# Altium PCB PCBFonte.PcbDoc
Units mm, origin at the board's own origin, x right, y up, seen from the top; angles counter-clockwise.
Board outline 100 x 70.75 mm, 2 copper layers (Top Layer, Bottom Layer); 47 components, 25 nets, 125 pads, 12 vias.
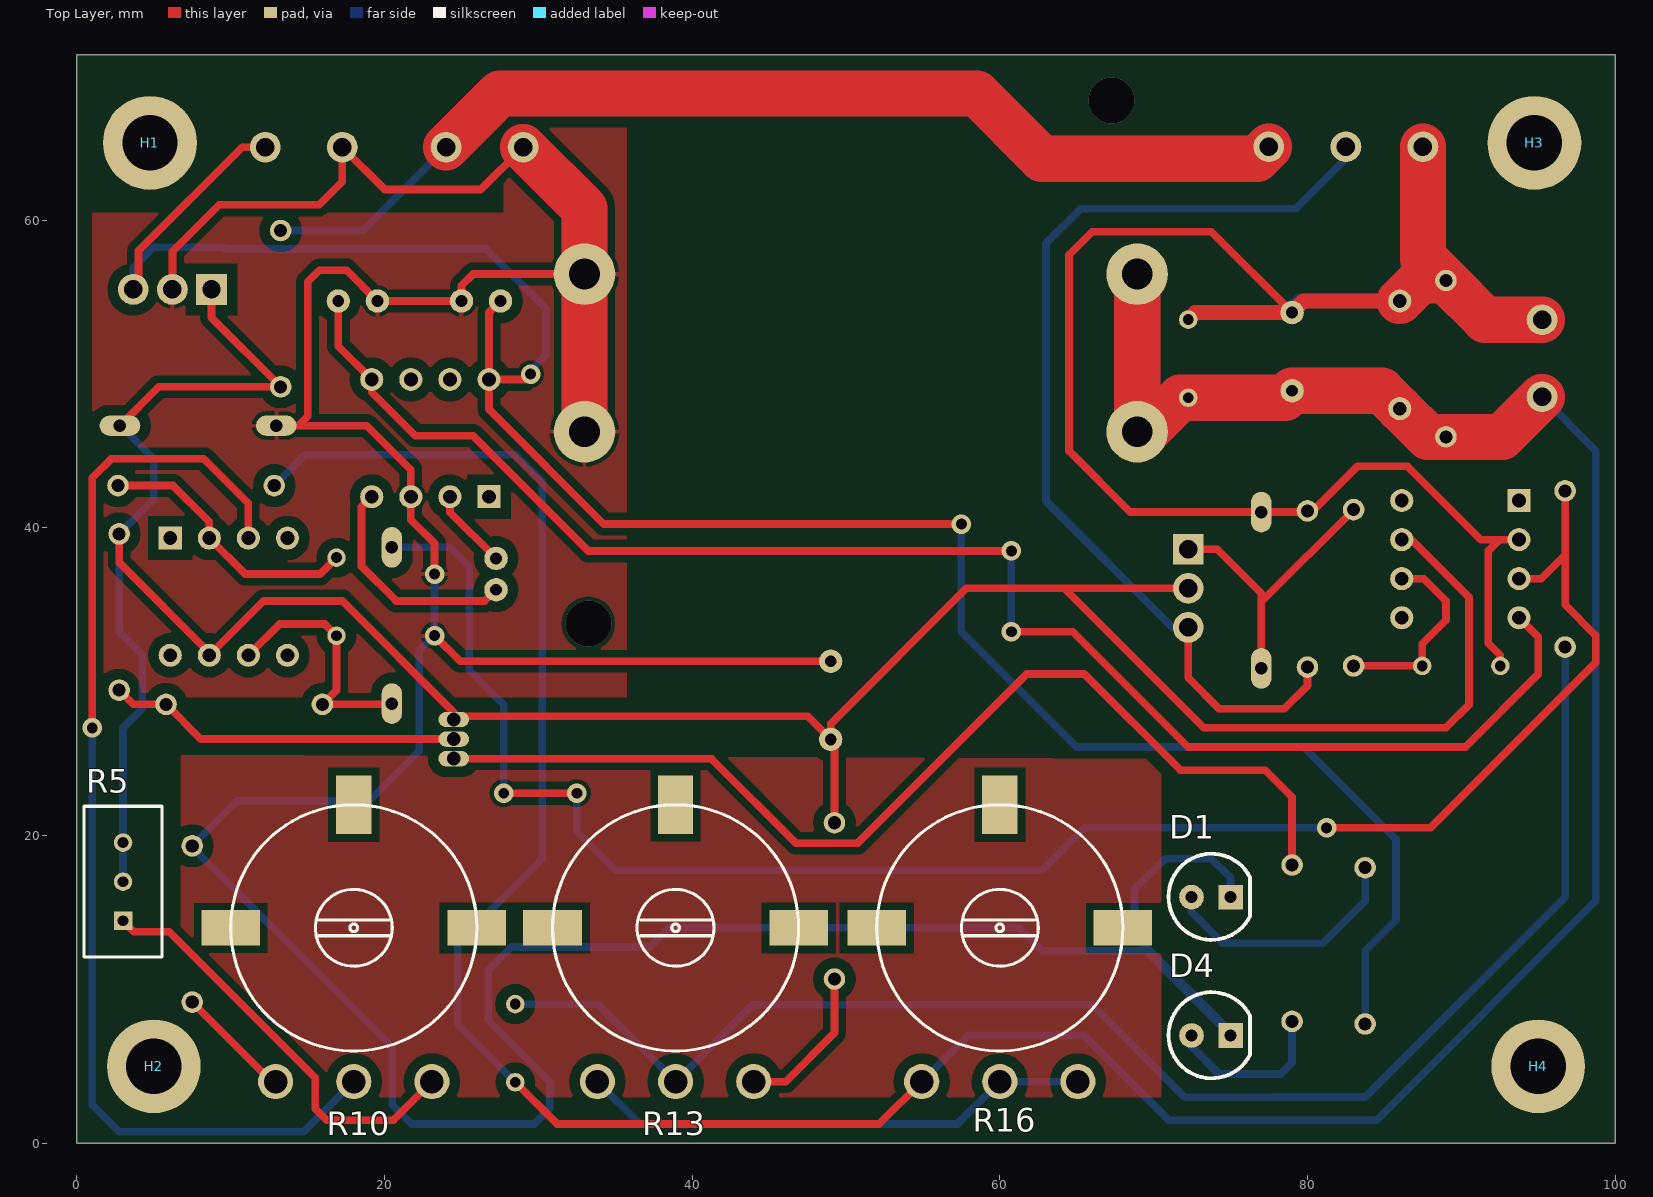
[diagram p0: Top Layer view]
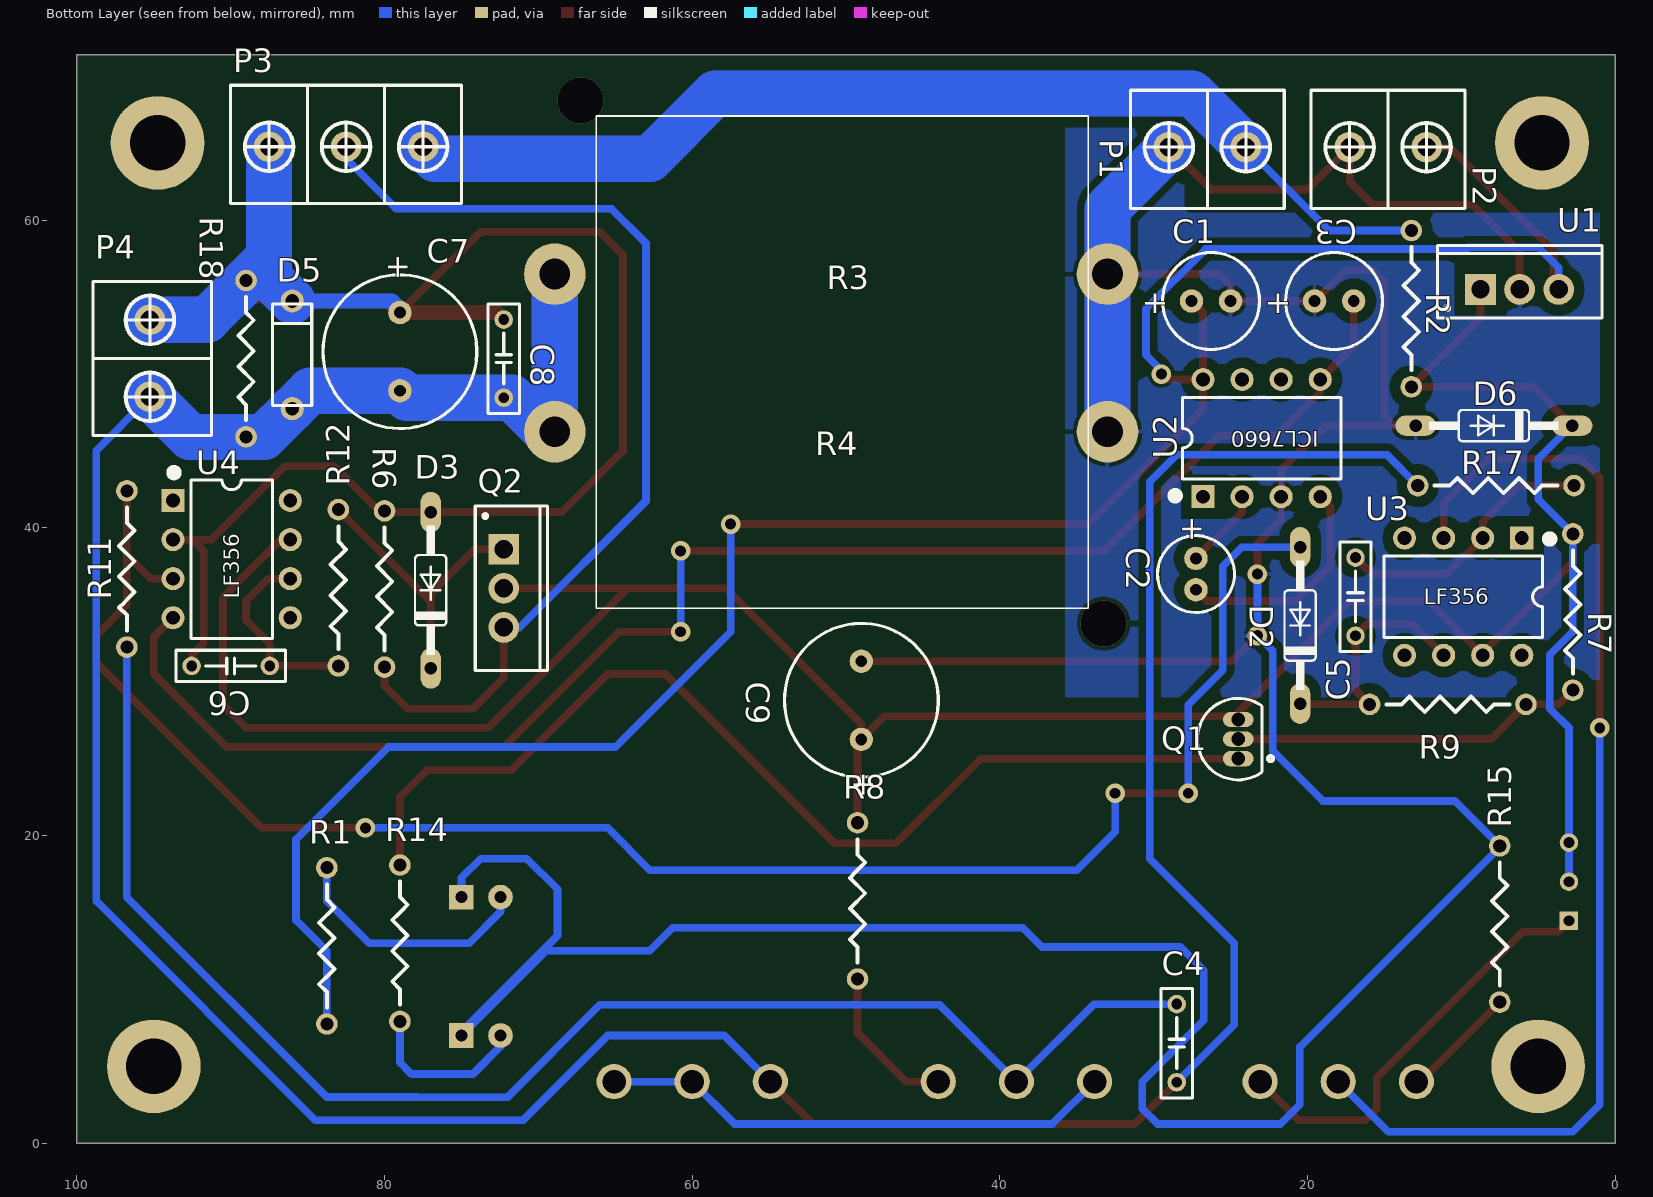
[diagram p1: Bottom Layer view, seen from below]
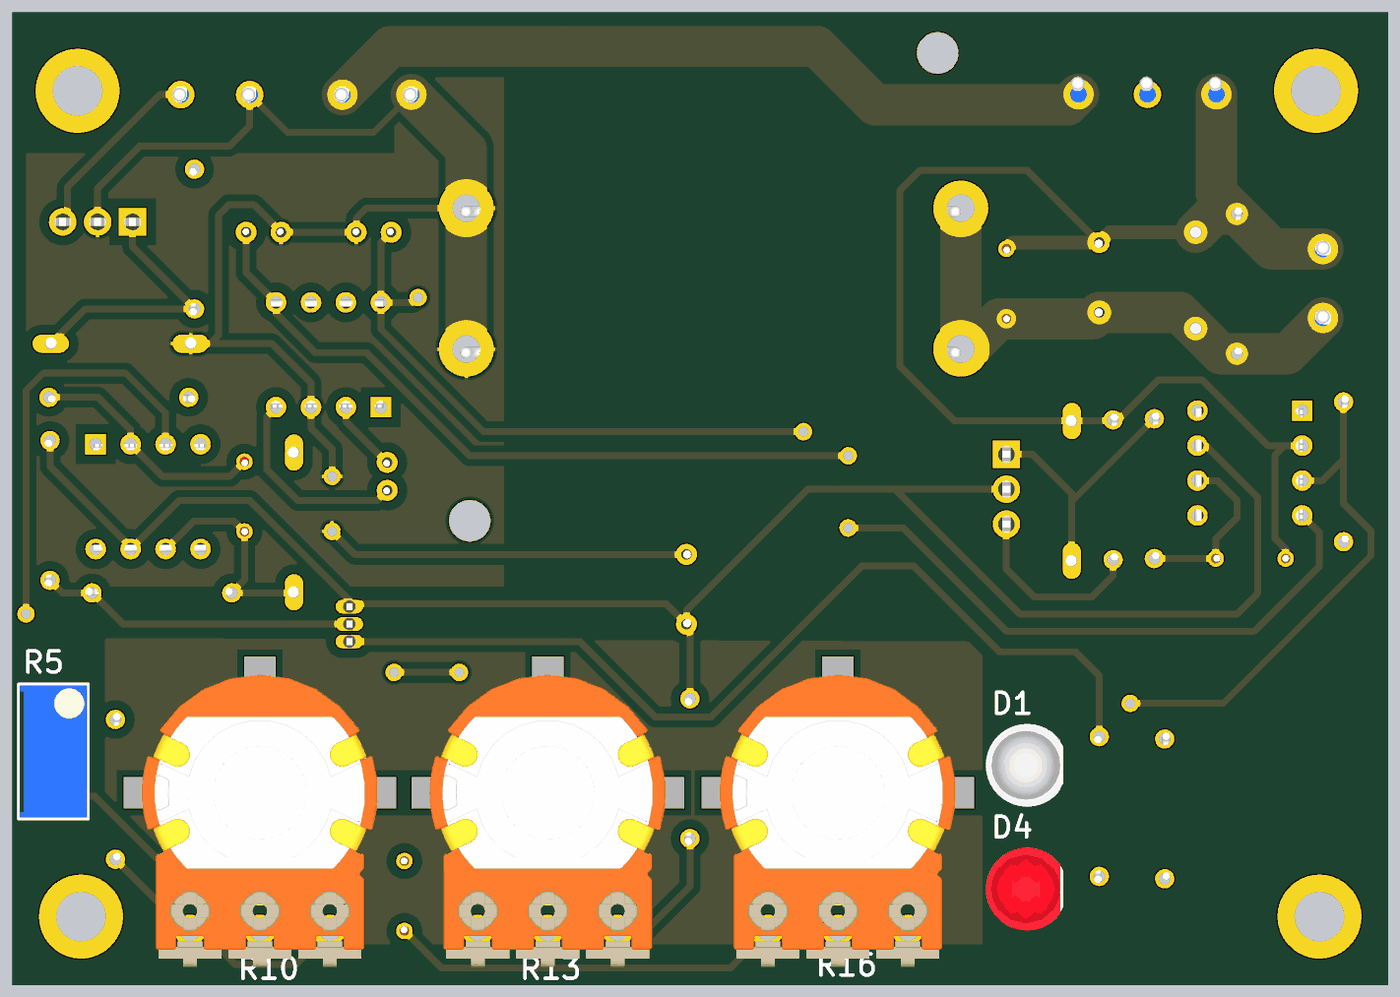
[diagram p2: 3D render of the assembled board from above, using the file's embedded part models]
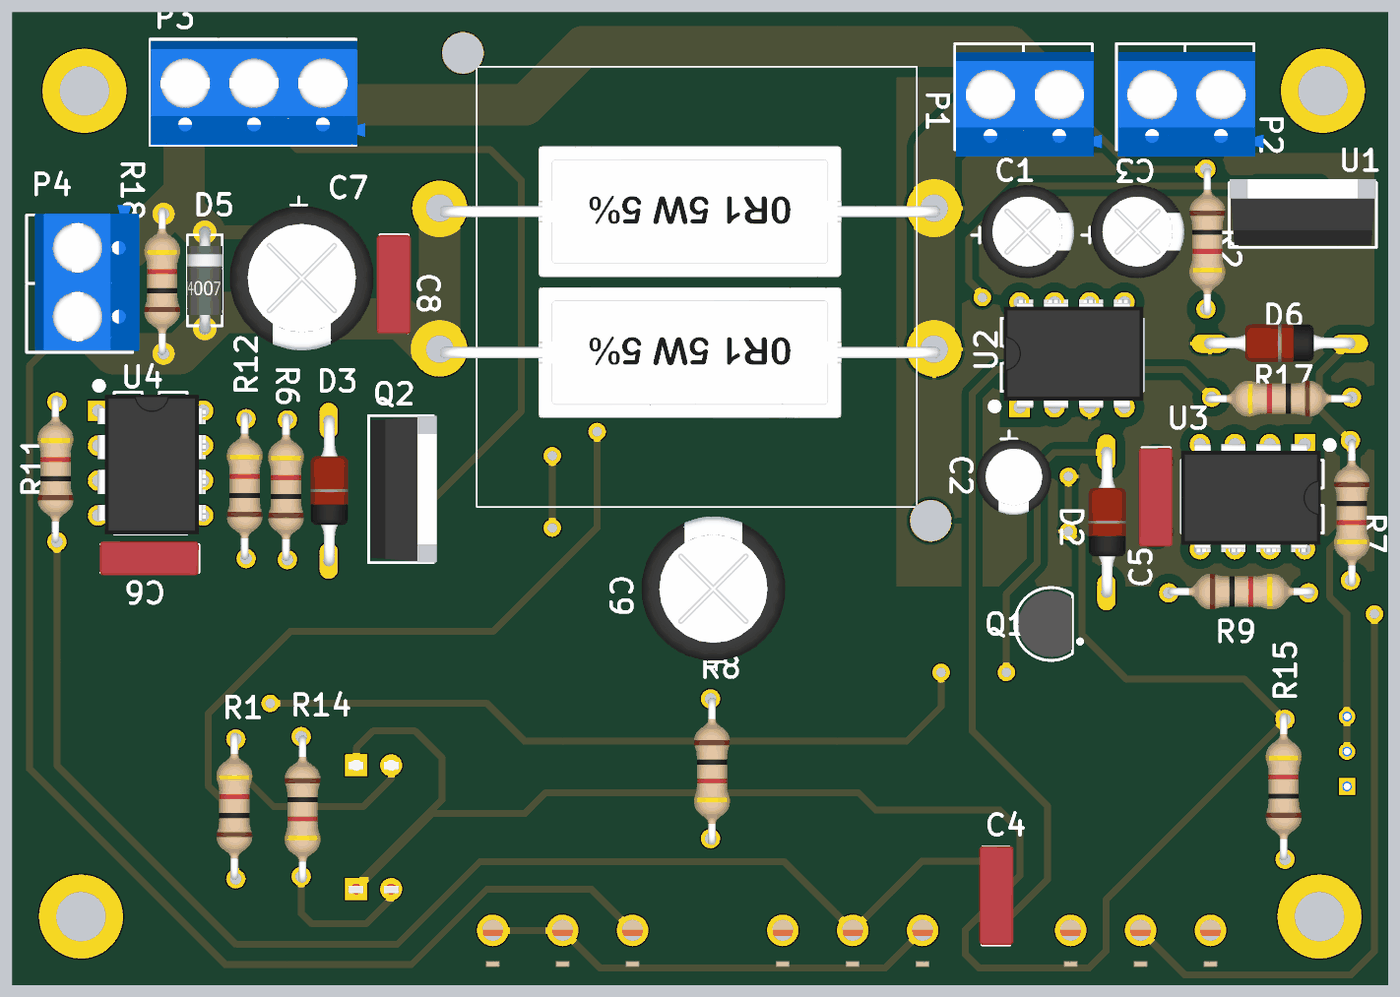
[diagram p3: 3D render of the assembled board from below, using the file's embedded part models]

## Layer stack, top to bottom
Top Solder: solder mask 0.0102, Solder Resist, Dk 3.5
Top Layer: signal copper 0.0356
Dielectric 1: dielectric 0.32, FR-4, Dk 4.8
Bottom Layer: signal copper 0.0356
Bottom Solder: solder mask 0.0102, Solder Resist, Dk 3.5

## Board outline
0,0 0,70.75 100,70.75 100,0

## Design rules (kind name [scope] priority, off if disabled: settings)
Clearance [All] p1: gap=0.254 ignorepadtopadclearanceinfootprint=FALSE except(0: Arc-Hole Track-Hole SMDPad-Hole THPad-Hole Via-Hole Fill-Hole Poly-Hole Region-Hole Text-Hole; 0.5: Arc-Fill Arc-Poly Arc-Region Track-Fill Track-Poly Track-Region SMDPad-Fill SMDPad-Poly SMDPad-Region Fill-Fill Fill-Poly Fill-Region Poly-Poly Poly-Region Region-Region; 0.7: THPad-Fill THPad-Poly THPad-Region)
PolygonConnect [All] p1: connectstyle=Relief reliefconductorwidth=0.254 reliefentries=4 polygonreliefangle="90 Angle" airgapwidth=0.254
RoutingVias [All] p1: holewidth=0.711 width=1.27 viastyle="Through Hole" minholewidth=0.711 minwidth=1.27 maxholewidth=0.711 maxwidth=1.27
SolderMaskExpansion [All] p1: expansion=0.102
Width POWERnet [InNetClass('PowerClass')] p1: maxlimit=3 minlimit=0.254 preferedwidth=2
Width Width_1 [All] p2: maxlimit=1 minlimit=0.254 preferedwidth=0.5
30 further rules are at their usual default settings.

## Components (designator, comment, footprint, x,y, rotation, side; value= is the part's Value field where it differs from the comment)
C1 "100uf" cap_rad_d6.3X11POL 26.27,54.75 r180 bottom
C2 "10uf" CAP_RAD_D5X11POL 27.25,37 r270 bottom
C3 "100uf" cap_rad_d6.3X11POL 18.27,54.75 r180 bottom
C4 "100pf" CAP_BOX_7.2X2.5X6.5_RD 28.5,6.5 r90 bottom value=1
C5 "330pF" CAP_BOX_7.2X2.5X6.5_RD 16.878,35.528 r270 bottom value=1
C6 "100pf" CAP_BOX_7.2X2.5X6.5_RD 90,31.028 r0 bottom value=1
C7 "1000uF" cap_rad_d10X12.5POL 79,51.46 r270 bottom
C8 "220n" CAP_BOX_7.2X2.5X6.5_RD 72.25,51 r270 bottom value=1
C9 "220uF" cap_rad_d10X12.5POL 49,28.79 r90 bottom
D1 "LED" LED_5MM_GREEN 72.46,16 r0 top
D2 "1n4148" DIODE-SIGNAL 20.378,34.278 r90 bottom
D3 "1n4148" DIODE-SIGNAL 76.9,36.568 r90 bottom
D4 "LED" LED_5MM_RED 72.46,7 r0 top
D5 "1n4007" DIODE-1N400X 86,51.25 r90 bottom
D6 "1N4749A" DIODE-SIGNAL 8.5,46.75 r0 bottom
H1 "Hole" HOLE_M3#1 4.25,65.028 r0 top
H2 "Hole" HOLE_M3#2 4,4 r0 top
H3 "Hole" HOLE_M3#3 94.75,65.028 r0 top
H4 "Hole" HOLE_M3#2 94,4 r0 top
P1 "Header 2" KRE-2 21.509,68.45 r0 bottom
P2 "Voltimetro" KRE-2 9.759,68.45 r0 bottom
P3 "Transistor" KRE-3 90,61.078 r180 bottom
P4 "Saída" KRE-2 98.95,56.019 r270 bottom
Q1 "BC557" TO-92 24.5,26.27 r180 bottom
Q2 "Tip48" TIP48 72.25,36.068 r270 bottom
R1 "470" AXIAL-0.4 83.75,12.83 r90 bottom value=0
R2 "2k" AXIAL-0.4 13.25,54.25 r270 bottom value=0
R3 "0.47" "RESISTOR 5W" 51.25,56.5 r0 bottom value=0
R4 "0.47" "RESISTOR 5W" 51.25,46.25 r0 bottom value=0
R5 "100k" VR1 3,17 r90 top
R6 "1k" AXIAL-0.4 80,36.028 r90 bottom value=0
R7 "2k2" AXIAL-0.4 2.75,34.528 r270 bottom value=0
R8 "150" AXIAL-0.4 49.25,15.75 r270 bottom value=0
R9 "10k" AXIAL-0.4 10.878,28.528 r180 bottom value=0
R10 "10k" POTENCIOMETRODEITADO 18,14 r0 top
R11 "2k2" AXIAL-0.4 96.75,37.33 r90 bottom value=0
R12 "1k" AXIAL-0.4 83,36.108 r90 bottom value=0
R13 "100k" POTENCIOMETRODEITADO 38.92,14 r0 top
R14 "3k9" AXIAL-0.4 79,13 r270 bottom value=0
R15 "33" AXIAL-0.4 7.5,14.25 r90 bottom value=0
R16 "10k" POTENCIOMETRODEITADO 60,14 r0 top
R17 "10k" AXIAL-0.4 7.75,42.75 r0 bottom value=0
R18 "6.8k" AXIAL-0.4 89,51 r90 bottom value=0
U1 "LM7805" LM7805 6.21,55.5 r180 bottom
U2 "ICL7660" ICL7660 22.98,45.838 r90 bottom
U3 "LF356" LF356 9.878,35.528 r270 bottom
U4 "LF356" LF356 89.94,37.968 r180 bottom

## Footprints (in the part's own frame and the unit in brackets; to place one, negate y for a bottom-side part, rotate by r counter-clockwise, add the part's x,y. Pads: shape width x height; smd on the part's side, far side on the other; paste and mask are expansions set on the pad)
AXIAL-0.4 [mm]
  round 1.4 hole 0.85: 1(-5.08,0) 2(5.08,0)
  silkscreen extent -4,-0.5 4,0.5, body extent -5.15,-1.19 5.55,1.4, height 2.69
CAP_BOX_7.2X2.5X6.5_RD [mm] "CAP_BOX_7.2x2.5x6.5_RD"
  round 1.2 hole 0.7: 1(-2.54,0) 2(2.54,0)
  silkscreen extent -3.56,-1.02 3.56,1.02, body extent -3.56,-1.27 3.64,1.23, height 6.5
CAP_RAD_D5X11POL [mil]
  round 60 hole 30: 1(-40,0) 2(40,0)
  silkscreen extent -98,-98 98,98, body extent -107,-107 110,110, height 492
cap_rad_d6.3X11POL [mil]
  round 60 hole 30: 1(-50,0) 2(50,0)
  silkscreen extent -124,-124 124,124, body extent -132,-132 136,136, height 492
cap_rad_d10X12.5POL [mil]
  round 60 hole 30: 1(-100,0) 2(100,0)
  silkscreen extent -197,-197 197,197, body extent -205,-205 208,208, height 551
DIODE-1N400X [mm]
  round 1.5 hole 0.9: 1(-3.5,0) 2(3.5,0)
  silkscreen extent -3.3,-1.27 3.3,1.27, body extent -3.9,-1.31 3.9,1.31, height 2.81
DIODE-SIGNAL [mil]
  oval 104x52 hole 32: 1(175.59,3.94) 2(-224.41,3.94)
  silkscreen extent -189,-36 141,44, body extent -239,-51 192,55, height 244
HOLE_M3#1 [mm]
  round 6.1 hole 3.6: 1(0.5,0)
HOLE_M3#2 [mm]
  round 6.1 hole 3.6: 1(1,1)
HOLE_M3#3 [mm]
  round 6.1 hole 3.6: 1(0,0)
ICL7660 [mm] "dip8"
  rect 1.5x1.5 hole 0.9: 1(-3.81,3.81)
  round 1.5 hole 0.9: 2(-3.81,1.27) 3(-3.81,-1.27) 4(-3.81,-3.81) 5(3.81,-3.81) 6(3.81,-1.27) 7(3.81,1.27) 8(3.81,3.81)
  silkscreen extent -3.95,-5.15 2.65,5.82, body extent -3.85,-5.18 4.02,4.98, height 5.33
KRE-2 [mm]
  round 2 hole 1.2: 1(2.491,3.7) 2(7.5,3.7)
  silkscreen extent 0,0 10,7.7, body extent -0.7,0.6 9.9,8.2, height 10
KRE-3 [mm]
  round 2 hole 1.2: 1(2.491,3.7) 2(7.5,3.7) 3(12.509,3.7)
  silkscreen extent 0,0 15,7.7, body extent 0.07,0 15.67,7.6, height 10
LED_5MM_GREEN [mm] "Led 5 mm"
  round 1.6 hole 0.8: 1(0,0)
  rect 1.6x1.6 hole 0.8: 2(2.54,0)
  silkscreen extent -1.49,-2.78 3.81,2.82, body extent -1.71,-3.01 3.71,3.01, height 8.81
LED_5MM_RED [mm] "Led 5 mm"
  round 1.6 hole 0.8: 1(0,0)
  rect 1.6x1.6 hole 0.8: 2(2.54,0)
  silkscreen extent -1.49,-2.78 3.81,2.82, body extent -1.71,-3.01 3.71,3.01, height 8.81
LF356 [mm]
  rect 1.5x1.5 hole 0.9: 1(-3.81,3.81)
  round 1.5 hole 0.9: 2(-3.81,1.27) 3(-3.81,-1.27) 4(-3.81,-3.81) 5(3.81,-3.81) 6(3.81,-1.27) 7(3.81,1.27) 8(3.81,3.81)
  silkscreen extent -3.95,-5.15 2.65,5.82, body extent -3.85,-5.18 4.02,4.98, height 5.33
LM7805 [mm]
  rect 2x2 hole 1.2: 1(-2.54,0)
  round 2 hole 1.2: 2(0,0) 3(2.54,0)
  silkscreen extent -5.35,-1.85 5.35,2.85, body extent -5.32,-1.7 5.33,3.1, height 19.5
POTENCIOMETRODEITADO [mil]
  round 90 hole 60: 1(-200,-393.7) 2(0,-393.7) 3(200,-393.7)
  rect 150x90 smd: ""(-314.96,0) ""(314.96,0)
  rect 90x150 smd: ""(0,314.96)
  silkscreen extent -315,-315 315,315, body extent -339,-498 339,339, height 954
"RESISTOR 5W" [mm]
  round 4 hole 2: 1(-18.25,0) 2(17.68,0)
  body extent -18.68,-4.5 17.68,5, height 10.5
TIP48 [mm]
  rect 2x2 hole 1.2: 1(-2.54,0)
  round 2 hole 1.2: 2(0,0) 3(2.54,0)
  silkscreen extent -5.35,-1.85 5.35,2.85, body extent -5.32,-1.7 5.33,4.28, height 19.5
TO-92 [mm] "TO, Flat Index; 3 In-Line, Axial Leads; Body Dia. 4.8mm; Leads 0.48 x 0.51 mm (max)"
  oval 2x1 hole 0.9: 1(0,-1.27) 2(0,0) 3(0,1.27)
  silkscreen extent -2.65,-2.65 2.26,2.65, body extent -2.4,-2.4 1.53,2.4, height 6
VR1 [mm]
  rect 1.2x1.2 hole 0.7: 1(-2.54,0)
  round 1.2 hole 0.7: 2(0,0) 3(2.54,0)
  silkscreen extent -4.9,-2.54 4.9,2.54, body extent -4.76,-2.41 4.77,2.42, height 11.6

## Part data
C1 C2 C3 C7 C9: library part CP, "Polarized Capacitor"
C4 C5 C6 C8: library part C, "Capacitor"
D2 D3 D5: library part D, "Diode"
D6: library part "D Zener", "Zener Diode"
P2 P4: library part "Header 2"
P3: library part "Header 3"
Q1: library part PNP, "PNP Bipolar Transistor"
R1 R2 R3 R4 R6 R7 R8 R9 R11 R12 R14 R15 R17 R18: library part R, "Resistor"
R5 R10 R13 R16: library part "R Adj", "Variable Resistor"

## Via types
v1: diameter 1.27, hole 0.711, Top Layer to Bottom Layer, 10 vias
v2: diameter 3, hole 3, Top Layer to Bottom Layer, 2 vias

## Nets (pads, with @x,y where several pads share a name; then routed paths per layer and width w, separated by ;. In a path a pad name is that pad's centre, name@x,y a point inside that pad or via, vN(x,y) a via of type N, cw(c..) or ccw(c..) an arc to the next point about the centre after c; other vN are vias at no path point)
+5: C1.1 P2.1 R1.1 U1.3 U2.8 | length 146.6
  Top Layer w0.5: U1.3 4,55.83 4,58 10.75,64.75 P2.1 ; C1.1 26.79,54 U2.8 ; v1(29.5,50) 29.148,49.648 U2.8 ; v1(57.5,40.25) 34.25,40.25 26.79,47.71 U2.8
  Bottom Layer w0.5: U1.3 3.67,56.92 5,58.25 9.5,58.25 9.624,58.126 26.624,58.126 30.5,54.25 30.5,51.25 29.5,50.25 v1(29.5,50) ; v1(57.5,40.25) 57.5,33.25 65,25.75 79.75,25.75 85.75,19.75 85.75,14.5 83.75,12.5 R1.1 R1.1@83.75,7.67
+24: C9.1 D6.2 Q1.3 Q2.2 R2.2 R5.2 R5.3 R7.1 R8.1 U1.1 U3.7 U4.7 | length 185.9
  Top Layer w0.5: R7.1 2.75,37.75 8.607,31.893 U3.7 12.14,35.25 17.25,35.25 24.5,28 Q1.3 24.71,27.75 47.5,27.75 C9.1 ; D6.2 5.32,49.17 R2.2 8.75,53.67 U1.1 ; R8.1 49.25,26 C9.1 ; Q2.2 64.182,36.068 ; U4.7 86.762,39.238 90.5,35.5 90.5,28.5 89,27 73.25,27 64.182,36.068 ; C9.1 49,27.25 57.818,36.068 64.182,36.068
  Bottom Layer w0.5: D6.2 2.85,46.65 5,44.5 5,41.858 R7.1 2.75,33.25 4.25,31.75 4.25,28.25 3,27 R5.3 R5.2 ; U3.7@8.5,31.61 U3.7
-5: C3.2 U2.5 U4.4 | length 101.4
  Top Layer w0.5: C3.2 17,51.818 U2.5 19.17,48.83 22,46 25.75,46 33.25,38.5 v1(60.75,38.5) ; v1(60.75,33.25) 64.75,33.25 72.25,25.75 90.25,25.75 95,30.5 95,32.908 U4.4
  Bottom Layer w0.5: v1(60.75,33.25) v1(60.75,38.5)
Base: P3.2 Q2.3 R6.1 | length 65.6
  Top Layer w0.5: Q2.3 72.25,30.25 74.25,28.25 78.5,28.25 80,29.75 R6.1
  Bottom Layer w0.5: Q2.3 71.222,33.528 63,41.75 63,58.5 65.25,60.75 79.25,60.75 82.5,64 P3.2
GND: C1.2 C3.1 C9.2 D1.2 D4.2 D6.1 P1.2 P2.2 R3.1 R4.1 R15.2 U1.2 U2.3 | length 292.6
  Top Layer w0.5: U1.2 6.21,57.96 9.25,61 15.75,61 17.259,62.509 P2.2 20.009,62 26.259,62 P1.2 ; D6.1 14.4,46.65 ; v1(23.25,33) 24.92,31.33 C9.2 ; v1(23.25,37) 23.25,39 21.71,40.54 U2.3 21.71,43.79 18.85,46.65 14.4,46.65 ; R3.1 25.75,56.5 25,55.75 C1.2 C3.1 17.54,56.75 15.75,56.75 15,56 15,47.25 14.4,46.65
  Top Layer w3: P1.2 33,60.759 R3.1 R4.1
  Bottom Layer w0.5: v1(23.25,37) v1(23.25,33) 22.25,32 22.25,25.5 19,22.25 10.42,22.25 R15.2 7.5,19.25 20.5,6.25 20.5,2.5 21.75,1.25 29.75,1.25 30.75,2.25 30.75,4 26.75,8 26.75,11.25 28.25,12.75 37.25,12.75 38.5,14 61.25,14 62.75,12.5 69.5,12.5 D4.2 D4.2@75,7.25 ; D4.2@75,7.5 D4.2@75,7.25 ; D1.2 75,17.25 73.75,18.5 70.75,18.5 68.75,16.5 68.75,13.5 D4.2@75,7.25
  Bottom Layer w3: P1.2 33,60.759 R3.1 R4.1
GNDX: C4.1 C7.2 C8.2 D5.1 P4.2 R3.2 R4.2 R16.1 R17.2 R18.1 | length 258
  Top Layer w0.5: C4.1 31.21,1.25 52.17,1.25 R16.1
  Top Layer w3: R3.2 R4.2 69.54,46.25 71.75,48.46 C8.2 78.54,48.46 C7.2 84.83,48.92 D5.1 87.83,45.92 R18.1 92.651,45.92 P4.2
  Bottom Layer w0.5: R17.2 14.83,44.75 28.5,44.75 30.25,43 30.25,18.5 24.75,13 24.75,7.71 C4.1 ; R16.1 57.92,7 65.5,7 71,1.5 84.5,1.5 98.75,15.75 98.75,45.019 P4.2
  Bottom Layer w3: R3.2 R4.2 69.5,46.25 71.71,48.46 C8.2 78.54,48.46 C7.2 84.83,48.92 D5.1 87.83,45.92 R18.1 92.651,45.92 P4.2
NetC2_1: C2.1 U2.2 | length 5.3
  Top Layer w0.5: U2.2 24.25,41.016 C2.1
NetC2_2: C2.2 U2.4 | length 14.8
  Top Layer w0.5: U2.4 18.5,41.358 18.5,37.5 20.75,35.25 26.516,35.25 C2.2
NetC4_2: C4.2 R11.1 R13.2 | length 96.6
  Top Layer w0.5: R13.2 R13.2@39,4.08
  Bottom Layer w0.5: C4.2 33.88,9.04 R13.2 43.92,9 66,9 72.004,2.996 77.812,2.996 77.816,3 83.75,3 96.75,16 R11.1
NetC5_1: C5.1 R17.1 U3.2 | length 17.6
  Top Layer w0.5: R17.1 6.25,42.75 8.607,40.393 U3.2 10.945,37 15.809,37 C5.1
NetC5_2: C5.2 D2.2 R9.1 U3.6 | length 16.3
  Top Layer w0.5: U3.6 13.18,33.75 16.116,33.75 C5.2 16.878,29.448 R9.1 20.428,28.528 D2.2
NetC6_1: C6.1 R12.1 U4.6 | length 12.8
  Top Layer w0.5: R12.1 C6.1 87.46,32.46 89,34 89,35.25 87.552,36.698 U4.6
NetD1_1: D1.1 R1.2 | length 16.3
  Bottom Layer w0.5: D1.1 72.46,15.04 74.5,13 81,13 83.75,15.75 R1.2@83.75,17.83
NetD2_1: D2.1 R11.2 U4.3 | length 116.7
  Top Layer w0.5: v1(27.75,22.75) v1(32.5,22.75) ; v1(81.25,20.5) 88,20.5 98.75,31.25 98.75,33 96.75,35 96.75,38.25 ; U4.3 95.198,36.698 96.75,38.25 ; R11.2 96.75,38.25
  Bottom Layer w0.5: D2.1 24.262,38.738 25.5,37.5 25.5,30.75 27.75,28.5 v1@27.75,23 ; v1(32.5,22.75) 32.5,20.25 35,17.75 62.75,17.75 65.5,20.5 v1(81.25,20.5)
NetD3_2: D3.2 Q2.1 R12.2 | length 19.3
  Top Layer w0.5: Q2.1 74.142,38.608 77,35.75 77,35.188 ; D3.2 77,35.188 ; R12.2 77,35.188
NetD4_1: D4.1 R14.2 | length 11
  Bottom Layer w0.5: D4.1 72.46,6.29 74.25,4.5 78.25,4.5 79,5.25 R14.2
NetQ1_1: Q1.1 R14.1 | length 69.1
  Top Layer w0.5: Q1.1 41.25,25 46.75,19.5 50.75,19.5 61.75,30.5 65.5,30.5 71.75,24.25 77.25,24.25 79,22.5 R14.1
NetQ1_2: Q1.2 R7.2 R9.2 | length 23.1
  Top Layer w0.5: R7.2 3.67,28.528 R9.2 8.056,26.27 Q1.2
NetR5_1: R5.1 R10.3 | length 27.7
  Top Layer w0.5: R5.1 3.71,13.75 6,13.75 15.5,4.25 15.5,2.25 16.25,1.5 20.58,1.5 R10.3
NetR8_2: R8.2 R13.3 | length 10.1
  Top Layer w0.5: R13.3 46.08,4 49.25,7.17 R8.2
NetR10_1: R10.1 R15.1 | length 7.6
  Top Layer w0.5: R15.1 12.67,4 R10.1
NetR10_2: R10.2 U3.3 | length 73.7
  Top Layer w0.5: v1@1,27.25 1,43.25 2.25,44.5 8.25,44.5 11.147,41.603 U3.3
  Bottom Layer w0.5: v1(1,27) 1,2.5 2.75,0.75 14.75,0.75 R10.2
NetR13_1: R13.1 R16.2 R16.3 | length 33.5
  Bottom Layer w0.5: R13.1 36.59,1.25 57.25,1.25 R16.2 R16.3
Saida/emissor: C6.2 C7.1 C8.1 D3.1 D5.2 P3.1 P4.1 R6.2 R18.2 U4.2 | length 134.9
  Top Layer w0.5: C7.1 73.75,59.25 66,59.25 64.5,57.75 64.5,45 68.472,41.028 D3.1 79.92,41.028 R6.2 80.358,41.108 83.25,44 86.5,44 91.262,39.238 92.488,39.238 ; C6.2 92.54,31.71 91.75,32.5 91.75,38.5 92.488,39.238 ; U4.2 92.488,39.238
  Top Layer w1: C8.1 72.71,54 C7.1 79.75,54.75 D5.2
  Top Layer w3: D5.2 87.33,56.08 R18.2 ; P3.1 87.509,57.571 R18.2 ; P4.1 91.552,53.528 R18.2
  Bottom Layer w1: C7.1 79,54.25 79.5,54.75 D5.2
  Bottom Layer w3: D5.2 87.509,56.259 87.509,57.571 ; P3.1 87.509,57.571 ; P4.1 91.552,53.528 R18.2 87.509,57.571
VCC: P1.1 P3.3 R2.1 | length 127
  Top Layer w3: P1.1 27.5,68.25 58.5,68.25 62.75,64 76.713,64 P3.3
  Bottom Layer w0.5: R2.1 18.58,59.33 P1.1
  Bottom Layer w3: P1.1 27.5,68.25 58.5,68.25 62.75,64 76.713,64 P3.3
pads on no net: H1.1 H2.1 H3.1 H4.1 R10. R13. R16. U2.1 U2.6 U2.7 U3.1 U3.4 U3.5 U3.8 U4.1 U4.5 U4.8
copper on no net:
  other v2: 33.25,33.778 67.25,67.778

## Polygon pours and split planes (outlines as drawn)
GND on Top Layer "Top Layer-GND" (solid, pour order 4): 35.75,29 1,29 1,60.5 17.5,60.5 27.75,60.5 27.75,66 35.75,66
no net on Top Layer "Top Layer-No Net" (solid, pour order 2): 6.75,25.25 6.75,13 16.75,3 70.5,3 70.5,24 69.5,25
no net on Top Layer "Top Layer-No Net 1" (solid, pour order 0): 6,22.75
GND on Bottom Layer "Bottom Layer-GND" (solid, pour order 8): 1,60.5 1,29 35.75,29 35.75,66 28,66 28,60.75 27.75,60.5

## Silkscreen, mask and mechanical layers (free items; w line width, h text height)
Bottom Overlay:
  lines w0.1: 34.25,34.778 34.25,66.778 66.25,66.778 66.25,34.778 34.25,34.778
Mechanical 15:
  the board outline again, w0.1

## Text inside footprints (layer, text, board x,y; h text height)
C1: Bottom Overlay "+" at 30.77,53.95 h1.52
C2: Bottom Overlay "+" at 28.15,40.8 h1.52 r90
C3: Bottom Overlay "+" at 22.77,53.95 h1.52
C7: Bottom Overlay "+" at 79.762,57.81 h1.52 r90
C9: Bottom Overlay "+" at 48.238,22.44 h1.52 r270